# Altium PCB Tigershark 3D R1.6.PcbDoc (part 4 of 4)
Units mil, origin at the board's own origin, x right, y up, seen from the top; angles counter-clockwise.
Board outline 5500 x 4600 mil, 4 copper layers (Top Layer, Groun Plane, Power Plane, Bottom Layer); 326 components, 251 nets, 1041 pads, 903 vias.
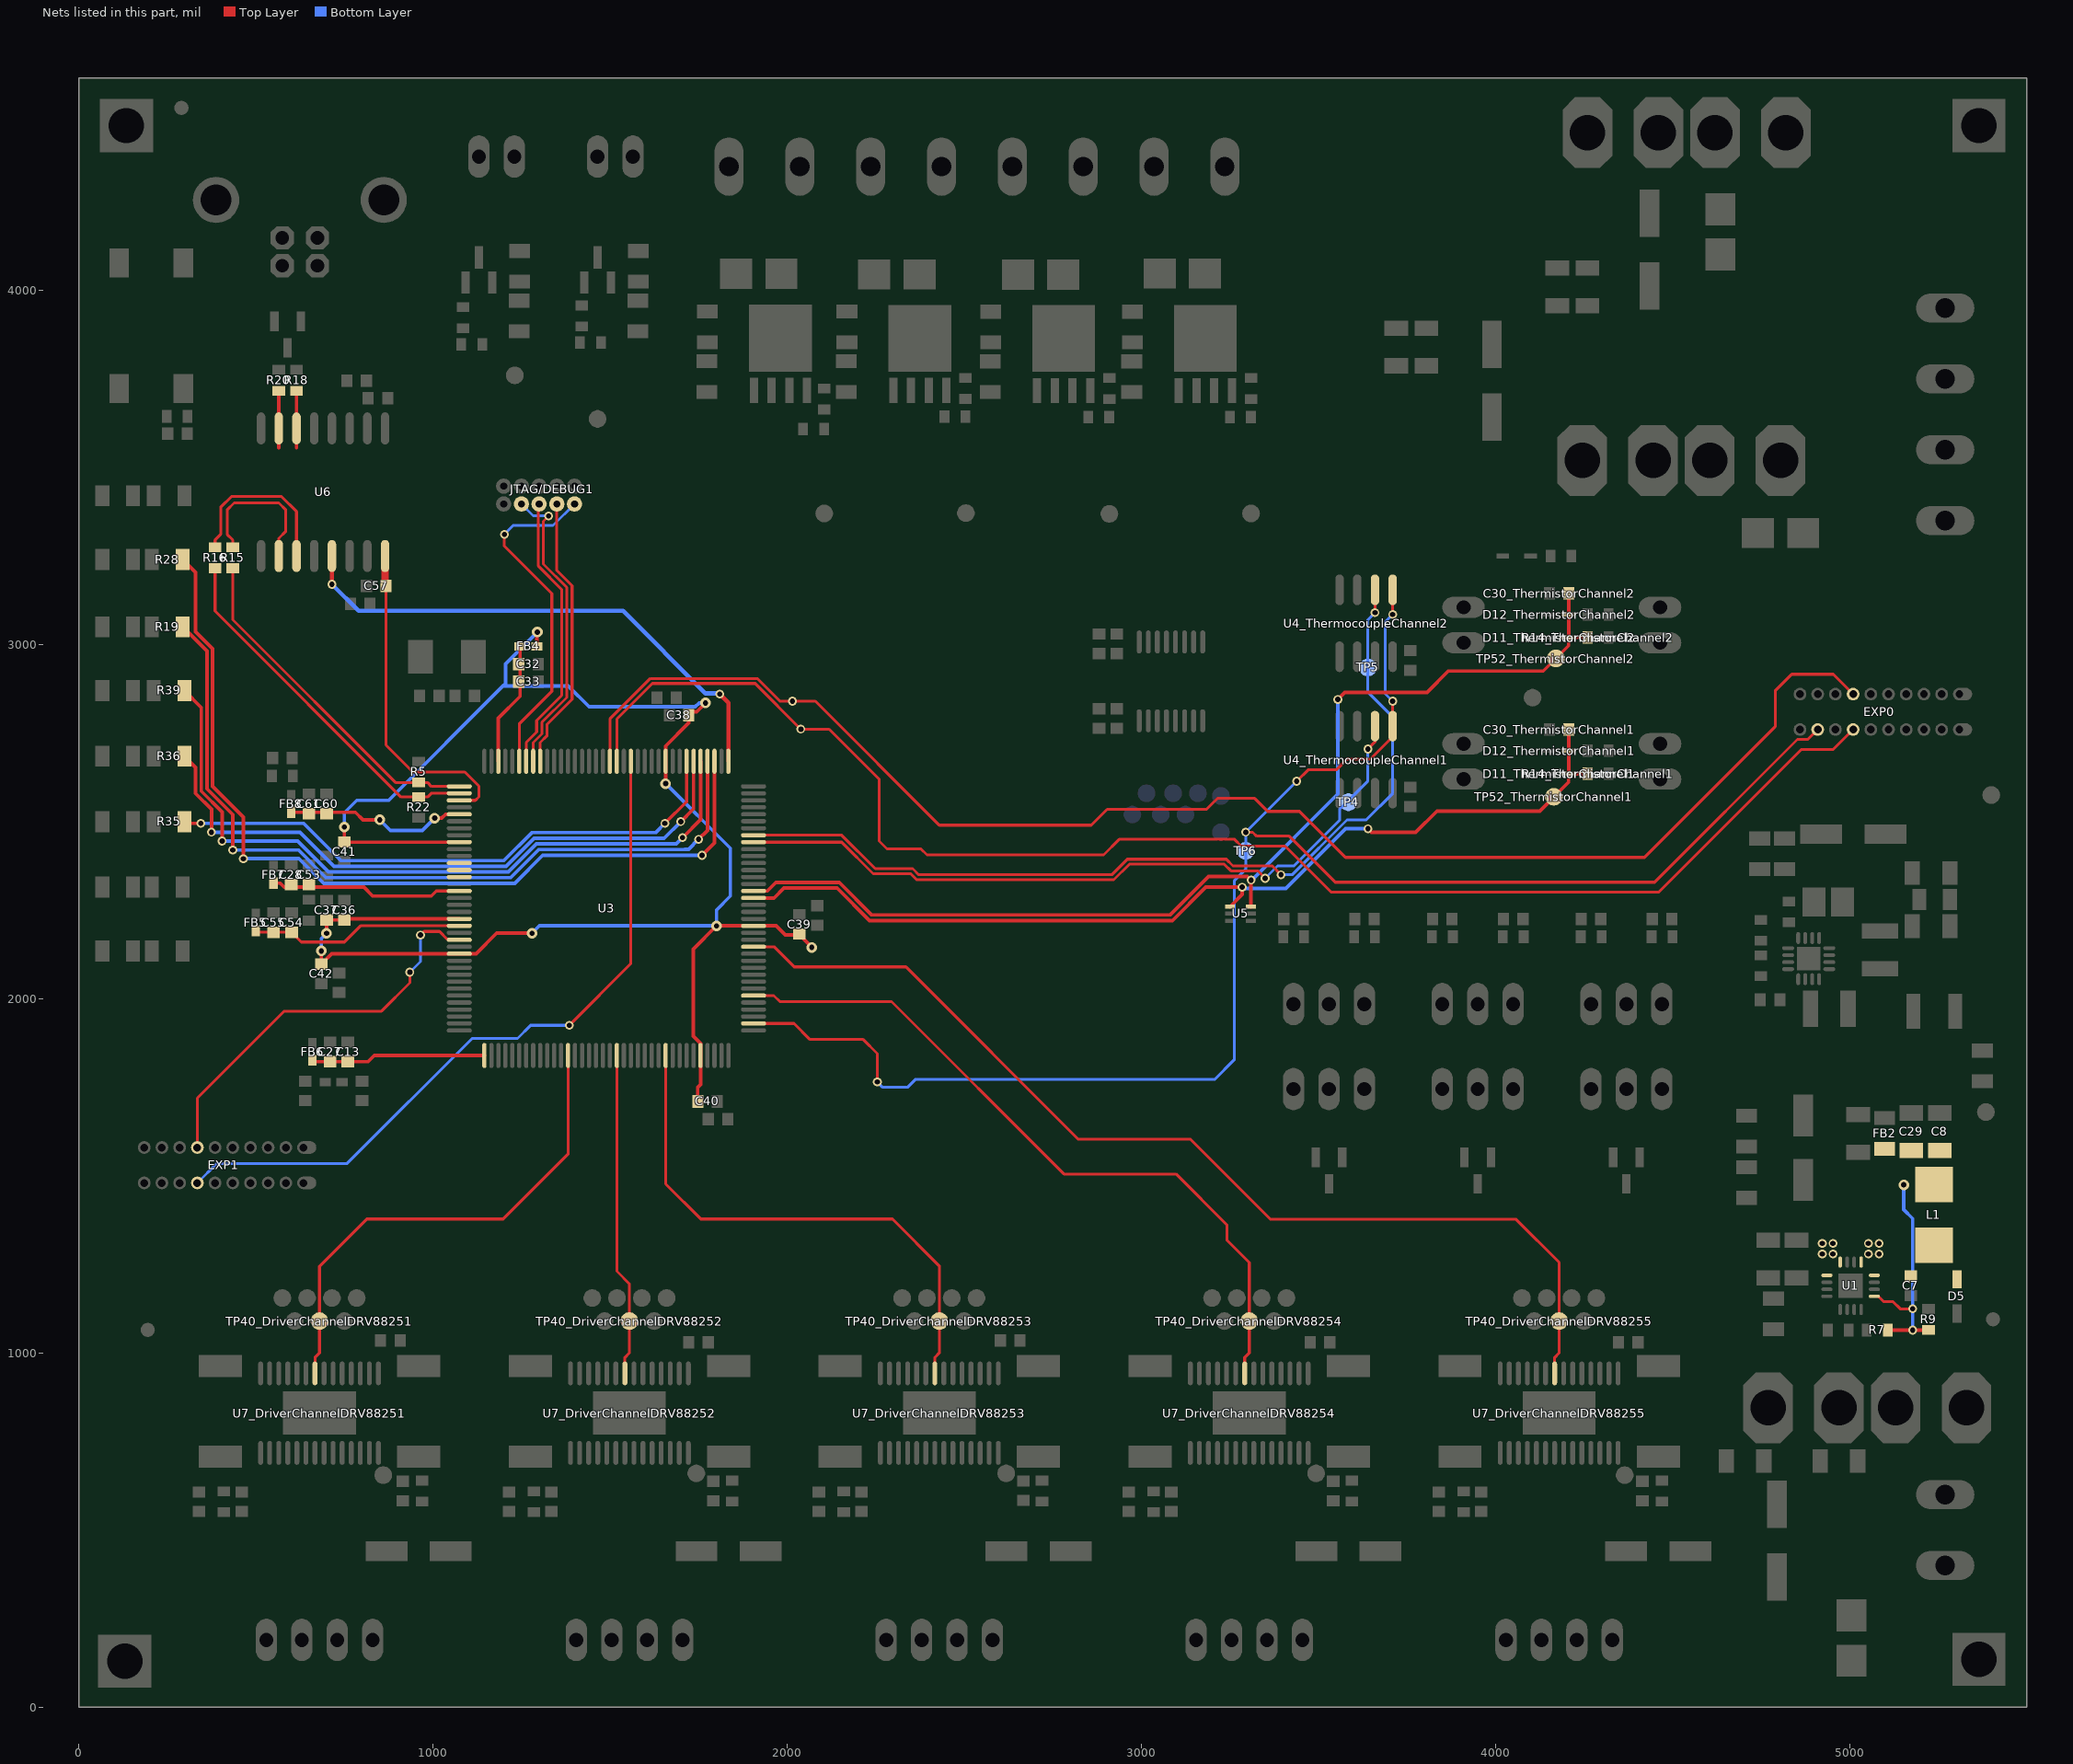
[diagram p6: the nets of this part, all layers, seen from the top]

## Via types
v1: diameter 25, hole 15, Top Layer to Bottom Layer, tented both sides, 432 vias
v2: diameter 30, hole 15, Top Layer to Bottom Layer, tented both sides, 366 vias
v3: diameter 19.68, hole 7.87, Top Layer to Bottom Layer, tented both sides, 75 vias
v4: diameter 50, hole 28, Top Layer to Bottom Layer, tented both sides, 13 vias
v5: diameter 50, hole 20, Top Layer to Bottom Layer, tented both sides, 9 vias
v6: diameter 25, hole 15, Top Layer to Bottom Layer, tented bottom, 8 vias

## Nets (pads, with @x,y where several pads share a name; then routed paths per layer and width w, separated by ;. In a path a pad name is that pad's centre, name@x,y a point inside that pad or via, vN(x,y) a via of type N, cw(c..) or ccw(c..) an arc to the next point about the centre after c; other vN are vias at no path point) (continued)
RX_LED: R19.2 U3.4 | length 2311.6
  Top Layer w10: R19.2@293.31,3050 362,2981.31 362,2592.75 435,2519.75 v1(435,2420) ; v1(1750,2450) 1775.43,2475.43 U3.4@1775.43,2670.35
  Bottom Layer w10: v1(435,2420) 620.25,2420 698.25,2342 1219.88,2342 1298.88,2421 1710.75,2421 1711.75,2422 1722,2422 v1(1750,2450)
RXD1: EXP0.17 U3.18 | length 4245.2
  Top Layer w8: U3.18@1499.84,2670.35 1499.84,2789.84 1614,2904 1916,2904 1980,2840 v1(2015,2840) 2079.8,2840 2429.8,2490 2858.99,2490 2903.99,2535 3184.2,2535 3214.7,2565.5 3320.52,2565.5 3357.02,2529 3446.8,2529 3576.8,2399 4420.81,2399 4790,2768.19 4790,2869.2 4836.8,2916 4954,2916 EXP0.17@5010,2860
SCLK: EXP0.2 TP6.1 U3.110 U4_ThermocoupleChannel1.5 U4_ThermocoupleChannel2.5 | length 4977.4
  Top Layer w8: U3.110@1905.35,1930.2 2019.8,1930.2 2065,1885 2215,1885 2255,1845 v1(2255,1765) ; v1(3295,2470) 3315,2470 3326,2459 3417.81,2459 3547.81,2329 4449.8,2329 4852.8,2732 4882,2732 EXP0.2@4910,2760 ; v1(3439,2614) 3471,2646 3550.8,2646 3580.8,2676 3646,2676 3710,2740 U4_ThermocoupleChannel1.5@3710,2769.49 v1(3710,2840) ; v1(3710,3085) U4_ThermocoupleChannel2.5@3710,3154.49
  Bottom Layer w8: v1(2255,1765) 2270,1750 2340,1750 2362,1772 3207,1772 3262.5,1827.5 3262.5,2332.5 3295,2365 v1(3295,2470) v1(3439,2614) ; v1(3710,2840) 3689,2861 3689,3064 v1(3710,3085)
SHDN: U3.50
SPD: U3.1 U6.13 | length 1503.1
  Top Layer w12: v1(715,3170) U6.13@715,3249.88 ; v1(1810,2860) 1834.49,2835.51 U3.1@1834.49,2670.35
  Bottom Layer w12: v1(715,3170) 790,3095 1537,3095 1770,2862 1808,2862 v1(1810,2860)
STEP1: TP40_DriverChannelDRV88251.1 U3.85 U7_DriverChannelDRV88251.22 | length 1418.9
  Top Layer w8: U7_DriverChannelDRV88251.22@667.2,942.2 667.2,987.2 680,1000 TP40_DriverChannelDRV88251.1@680,1090 680,1244.4 813.6,1378 1198.6,1378 1381.73,1561.13 U3.85@1381.73,1839.65
STEP2: TP40_DriverChannelDRV88252.1 U3.92 U7_DriverChannelDRV88252.22 | length 917.4
  Top Layer w8: U3.92@1519.53,1839.65 1519.53,1230.47 1555,1195 TP40_DriverChannelDRV88252.1@1555,1090 1555,1000 1542.2,987.2 U7_DriverChannelDRV88252.22@1542.2,942.2
STEP3: TP40_DriverChannelDRV88253.1 U3.99 U7_DriverChannelDRV88253.22 | length 1539.8
  Top Layer w8: U3.99@1657.32,1839.65 1657.32,1477.07 1756.4,1378 2297.6,1378 2430,1245.6 TP40_DriverChannelDRV88253.1@2430,1090 2430,1000 2417.2,987.2 U7_DriverChannelDRV88253.22@2417.2,942.2
STEP4: TP40_DriverChannelDRV88254.1 U3.114 U7_DriverChannelDRV88254.22 | length 2055.5
  Top Layer w8: U3.114@1905.35,2008.94 1962.87,2008.94 1979.93,1991.88 2295.13,1991.88 2782.01,1505 3098.4,1505 3242,1361.4 3242,1318.4 3305,1255.4 TP40_DriverChannelDRV88254.1@3305,1090 3305,1000 3292.2,987.2 U7_DriverChannelDRV88254.22@3292.2,942.2
STEP5: TP40_DriverChannelDRV88255.1 U3.121 U7_DriverChannelDRV88255.22 | length 2962.5
  Top Layer w8: U3.121@1905.35,2146.73 1963.67,2146.73 2020.52,2089.88 2335.72,2089.88 2822.6,1603 3139.4,1603 3365.4,1377 4058.6,1377 4180,1255.6 TP40_DriverChannelDRV88255.1@4180,1090 4180,1000 4167.2,987.2 U7_DriverChannelDRV88255.22@4167.2,942.2
STEP_EXP1: EXP1.4 U3.15 | length 2051.7
  Top Layer w8: v1(1385,1925) 1558.9,2098.9 U3.15@1558.9,2670.35
  Bottom Layer w8: EXP1.4@335,1480 390,1535 758.01,1535 1111.01,1888 1239.01,1888 1276.01,1925 v1(1385,1925)
STEP_EXP2: EXP1.17 U3.59 | length 1145.2
  Top Layer w8: EXP1.17@335,1580 335,1719.4 580.6,1965 855,1965 935,2045 v1(935,2075) ; v1(965,2180) 975,2190 1018.73,2190 1040.12,2168.6 1072.46,2168.6 U3.59@1074.65,2166.42
  Bottom Layer w8: v1(935,2075) 965,2105 v1(965,2180)
SW: C7.1 D5.2 L1.1 U1.1 U1.12 U1.13 U1.16
  other v1: 4923.07,1279.53 4953.07,1279.53 5053.07,1279.53 5083.07,1279.53 4923.07,1309.53 4953.07,1309.53 5053.07,1309.53 5083.07,1309.53
SW_OUT: C8.2 C29.1 FB2.1 L1.2 R7.2 R9.1 U1.9 | length 668.1
  Top Layer w8: U1.9@5070,1160 5081.39,1160 5096.86,1144.53 5123.07,1144.53 5143.07,1124.53 v1(5178.07,1124.53)
  Top Layer w10: R7.2@5102.6,1064.53 v1(5178.07,1064.53) R9.1@5227.6,1064.53
  Bottom Layer w10: v2(5153.07,1474.53) 5153.07,1404.53 5178.07,1379.53 v1(5178.07,1064.53)
TC_CS1: TP4.1 U3.136 U4_ThermocoupleChannel1.6 | length 2108.3
  Top Layer w8: U3.136@1905.35,2442.01 2154.43,2442.01 2243.43,2353 2349.01,2353 2366.01,2336 2922.78,2336 2966.71,2379.93 3234.46,2379.93 3253.39,2361 3329,2361 v1(3350,2340) ; v1(3640,2705) 3660,2725 U4_ThermocoupleChannel1.6@3660,2769.49
  Bottom Layer w8: v1(3350,2340) 3385,2375 3431.21,2375 3560,2503.79 3560,2535 3640,2615 v1(3640,2705)
TC_CS2: TP5.1 U3.137 U4_ThermocoupleChannel2.6 | length 2594.3
  Top Layer w8: U3.137@1905.35,2461.69 2154.54,2461.69 2249.23,2367 2354.81,2367 2371.81,2350 2916.98,2350 2960.91,2393.93 3240.26,2393.93 3259.19,2375 3370,2375 v1(3395,2350) ; v1(3660,3090) U4_ThermocoupleChannel2.6@3660,3154.49
  Bottom Layer w8: v1(3395,2350) 3426.01,2350 3581.01,2505 3635,2505 3710,2580 3710,2795 3640,2865 3640,3070 v1(3660,3090)
TCK/SWDCLK: JTAG/DEBUG1.4 U3.28 | length 781.7
  Top Layer w8: U3.28@1302.99,2670.35 1302.99,2722.99 1322,2742 1322,2774 1393,2845 1393,3166 1350,3209 JTAG/DEBUG1.4@1350,3397
TDI: JTAG/DEBUG1.8 U3.29 | length 857.5
  Top Layer w8: U3.29@1283.31,2670.35 1283.31,2723.11 1308,2747.8 1308,2780.6 1378,2850.6 1378,3161.2 1312,3227.2 1312,3348 v1(1327,3363)
  Bottom Layer w8: JTAG/DEBUG1.8@1250,3397 1283.5,3363.5 1327.5,3363.5 v1(1327,3363)
TDO/SWO: JTAG/DEBUG1.6 U3.30 | length 796.4
  Top Layer w8: U3.30@1263.62,2670.35 1263.62,2723.62 1293,2753 1293,2785.4 1364,2856.4 1364,3155.4 1298,3221.4 1298,3395 JTAG/DEBUG1.6@1300,3397
THERM_AN1: C30_ThermistorChannel1.2 D11_ThermistorChannel1.1 D12_ThermistorChannel1.2 R14_ThermistorChannel1.1 TP52_ThermistorChannel1.1 U3.128 U5.4 | length 2795
  Top Layer w10: U3.128@1905.35,2284.53 1963.31,2284.53 1991.24,2312.45 2141.15,2312.45 2233.1,2220.5 3088.13,2220.5 3182.63,2315 v1(3285,2315) 3285,2294.21 U5.4@3250.47,2259.69 ; v1(3640,2480) 3650,2470 3775,2470 3835,2530 4125,2530 4206.57,2611.57 D11_ThermistorChannel1.1@4206.57,2635 R14_ThermistorChannel1.1@4260.47,2635 ; D11_ThermistorChannel1.1@4207.56,2635.98 C30_ThermistorChannel1.2@4207.56,2760
  Bottom Layer w10: v1(3285,2315) 3288.5,2311.5 3408.73,2311.5 3577.23,2480 v1(3640,2480)
THERM_AN2: C30_ThermistorChannel2.2 D11_ThermistorChannel2.1 D12_ThermistorChannel2.2 R14_ThermistorChannel2.1 TP52_ThermistorChannel2.1 U3.129 U5.3 | length 3105.6
  Top Layer w10: U3.129@1905.35,2304.21 1944.21,2304.21 1968.45,2328.45 2147.78,2328.45 2239.73,2236.5 3081.5,2236.5 3190,2345 3300,2345 v1(3310,2335) 3310,2260.16 U5.3@3309.53,2259.69 ; v1(3555,2845) 3575,2865 3807.28,2865 3867.28,2925 4135,2925 4206.57,2996.57 D11_ThermistorChannel2.1@4206.57,3020 R14_ThermistorChannel2.1@4260.47,3020 ; D11_ThermistorChannel2.1@4207.56,3020.98 C30_ThermistorChannel2.2@4207.56,3145
  Bottom Layer w10: v1(3310,2335) 3311.77,2335 3555,2578.23 v1(3555,2845)
TMS/SWDIO: JTAG/DEBUG1.2 U3.31 | length 967.7
  Top Layer w8: v1(1202,3311) 1202,3277.8 1336,3143.8 1336,2868 1243.94,2775.94 U3.31@1243.94,2670.35
  Bottom Layer w8: v1@1202,3311.46 1226.54,3336 1339,3336 JTAG/DEBUG1.2@1400,3397
TX_LED: R28.2 U3.3 | length 2553.2
  Top Layer w10: R28.2@293.31,3240 330,3203.31 330,3035.93 378,2987.93 378,2599.37 465,2512.37 v1(465,2395) ; v1(1760,2405) 1795.12,2440.12 U3.3@1795.12,2670.35
  Bottom Layer w10: v1(465,2395) 466,2396 621.63,2396 691.63,2326 1231,2326 1310,2405 v1(1760,2405)
TXD1: EXP0.4 U3.17 | length 4224.4
  Top Layer w8: U3.17@1519.53,2670.35 1519.53,2789.73 1619.8,2890 1910,2890 v1(2039,2761) 2119,2761 2260,2620 2260,2445 2282,2423 2378.01,2423 2395.01,2406 2893.79,2406 2937.71,2449.93 3263.45,2449.93 3282.38,2431 3406.21,2431 3536.21,2301 4461.4,2301 4864.4,2704 4954,2704 EXP0.4@5010,2760
UD_N: R18.1 U6.6 | length 161.4
  Top Layer w10: 615,3555 R18.1@615,3716.35
UD_P: R20.1 U6.7 | length 161.4
  Top Layer w10: 565,3555 R20.1@565,3716.35
UI_N: R16.2 U6.11 | length 489.4
  Top Layer w8: R16.2@385,3274.53 385,3295 401,3311 401,3387.46 431.54,3418 572.46,3418 615,3375.46 U6.11@615,3249.88
UI_P: R15.2 U6.10 | length 433.1
  Top Layer w8: R15.2@435,3274.53 435,3295 419,3311 419,3380 439,3400 565,3400 585,3380 585,3320 565,3300 U6.10@565,3249.88
UMCU_N: R16.1 R22.1 U3.38 | length 1032.3
  Top Layer w8: R16.1@385,3215.47 385,3094.54 910.02,2569.53 R22.1@960,2569.53 985,2569.53 995.28,2579.8 U3.38@1074.65,2579.8
UMCU_P: R5.1 R15.1 U3.37 | length 980
  Top Layer w8: R15.1@435,3215.47 435,3070 894.53,2610.47 R5.1@960,2610.47 985,2610.47 995.98,2599.49 U3.37@1074.65,2599.49
VBUS: C57.2 U3.39 U6.16 | length 1011.1
  Top Layer w8: U6.16@867.56,3245 867.56,2716.33 943.89,2640 1060,2640 1090,2640 1130,2600 1130,2570 1120.12,2560.12 U3.39@1074.65,2560.12
  Top Layer w20: C57.2@865,3167.56 U6.16@865,3249.88
VDDANA: C13.2 C27.2 FB6.2 U3.73 | length 494.3
  Top Layer w10: FB6.2@663.94,1822.44 C27.2@710,1822.44 C13.2@760,1822.44 817.44,1822.44 834.65,1839.65 U3.73@1145.51,1839.65
  Top Layer w15: FB6.2@660,1826.38 FB6.2@663.94,1822.44
VDDBU: C28.2 C53.2 FB7.2 U3.52 | length 545.6
  Top Layer w10: FB7.2@550,2326.38 568.62,2326.38 580,2315 805,2315 830,2290 995.72,2290 1009.93,2304.21 U3.52@1074.65,2304.21
VDDIN: C54.2 C55.2 FB5.2 U3.57 | length 617.1
  Top Layer w8: FB5.2@501.22,2201.38 FB5.2@505.16,2197.44 ; FB5.2@503.94,2187.44 C55.2@550,2187.44 C54.2@601.22,2187.44 628.66,2160 750,2160 795.79,2205.79 U3.57@1074.65,2205.79 ; C54.2@601.22,2197.44 C54.2@608.66,2190
VDDOUT: C36.2 C37.2 C38.2 C39.2 C40.2 C41.2 C42.2 FB4.1 U3.10 U3.45 U3.56 U3.61 U3.104 U3.124 | length 5110.8
  Top Layer w10: v2(685,2135) C42.2@685,2097.56 714.49,2127.05 U3.61@1074.65,2127.05 1122.05,2127.05 1180,2185 v2(1280,2185) ; v2(700,2185) C37.2@700,2222.44 C36.2@750,2222.44 753.03,2225.47 U3.56@1074.65,2225.47 ; v2(750,2485) C41.2@750,2442.56 750.55,2442.01 U3.45@1074.65,2442.01 ; FB4.1@1293.62,2995 1293.62,3033.62 v2(1295,3035) ; v2(1657.32,2607.32) U3.10@1657.32,2670.35 1657.32,2713.54 1722.56,2778.77 C38.2@1722.56,2800 1732.56,2810 1745,2810 v2(1770,2835) ; C40.2@1747.87,1710 1747.87,1749.8 1755.75,1757.68 U3.104@1755.75,1839.65 1755.75,1873.4 1735,1894.14 1735,2140 v2(1800.79,2205.79) U3.124@1905.35,2205.79 1969.21,2205.79 ; 1970.16,2204.84 1995,2180 C39.2@2035,2180 ; C39.2@2035,2182.44 C39.2@2035,2180 ; v2(2070,2145) C39.2@2035,2180
  Bottom Layer w10: v2(685,2135) 685,2170 v2(700,2185) ; v2(750,2485) 750,2525 785,2560 875,2560 1197.5,2882.5 ; v2(1280,2185) 1300.79,2205.79 v2(1800.79,2205.79) 1800.79,2250.79 1840,2290 1840,2425 v2@1657.5,2607.5 ; v2(1295,3035) 1205,2945 1205,2890 1197.5,2882.5 ; v2(1770,2835) 1751.77,2835 1740.77,2824 1441,2824 1382.5,2882.5 1197.5,2882.5
VDDPLL: C32.2 C33.2 FB4.2 U3.34 | length 350.1
  Top Layer w10: U3.34@1184.88,2670.35 1184.88,2792.12 1246.38,2853.62 FB4.2@1246.38,2995
VDDUTMI: C60.2 C61.2 FB8.2 U3.41 | length 524.9
  Top Layer w10: FB8.2@600,2526.38 781.25,2526.38 802.63,2505 v2(850,2505) ; v2(1005,2510) 1025,2510 1035.75,2520.75 U3.41@1074.65,2520.75
  Bottom Layer w10: v2@850,2515 v2(850,2505) 880,2475 970,2475 v2(1005,2510)
X_LED: R39.2 U3.5 | length 2081.8
  Top Layer w10: R39.2@298.31,2870 346,2822.31 346,2586.12 405,2527.12 v1(405,2445) ; v1(1705,2455) 1755.75,2505.75 U3.5@1755.75,2670.35
  Bottom Layer w10: v1(405,2445) 617.88,2445 704.88,2358 1213.25,2358 1292.25,2437 1687,2437 v1(1705,2455)
XIN32: U3.48
XOUT32: U3.49
Y_LED: R36.2 U3.6 | length 1849
  Top Layer w10: R36.2@298.31,2685 330,2653.31 330,2579.49 375,2534.49 v1(375,2470) ; v1(1700,2500) 1736.06,2536.06 U3.6@1736.06,2670.35
  Bottom Layer w10: v1(375,2470) 625,2470 721,2374 1206.63,2374 1285.63,2453 1653,2453 v1(1700,2500)
Z_LED: R35.2 U3.7 | length 1646.5
  Top Layer w10: R35.2@298.31,2500 303.31,2495 v1(345,2495) ; v1(1655,2495) 1716.38,2556.38 U3.7@1716.38,2670.35
  Bottom Layer w10: v1(345,2495) 635,2495 740,2390 1200,2390 1279,2469 1629,2469 v1(1655,2495)
pads on no net: D12.2 FD1.1 FD2.1 FD3.1 JTAG/DEBUG1.1@1475.59,3478.5 JTAG/DEBUG1.7 U1.6 U1.7 U3.55 U3.111 U3.130 U3.138 U4_ThermocoupleChannel1.8 U4_ThermocoupleChannel2.8 U7_DriverChannelDRV88251.18 U7_DriverChannelDRV88251.19 U7_DriverChannelDRV88251.23 U7_DriverChannelDRV88251.27 U7_DriverChannelDRV88252.18 U7_DriverChannelDRV88252.19 U7_DriverChannelDRV88252.23 U7_DriverChannelDRV88252.27 U7_DriverChannelDRV88253.18 U7_DriverChannelDRV88253.19 U7_DriverChannelDRV88253.23 U7_DriverChannelDRV88253.27 U7_DriverChannelDRV88254.18 U7_DriverChannelDRV88254.19 U7_DriverChannelDRV88254.23 U7_DriverChannelDRV88254.27 U7_DriverChannelDRV88255.18 U7_DriverChannelDRV88255.19 U7_DriverChannelDRV88255.23 U7_DriverChannelDRV88255.27 USB.P$1 USB.P$2

## Polygon pours and split planes (outlines as drawn)
+12VCC2 on Top Layer "Top Layer-No Net" (solid, pour order 116): 4790,3395 4520,3395 4520,3645 4120,3645 4120,3765 3922,3765 3922,3810 3650,3810 3650,3650 3385,3650 3385,3300 4195,3300 4195,3185 4790,3185
NetC10_2 on Top Layer "Mechanical 15-No Net" (solid, remove dead copper, pour order 86): 5048.07,1209.53 5048.07,1189.53 5083.07,1189.53 5083.07,1179.53 5148.07,1179.53 5148.07,1219.53 5083.07,1219.53 5083.07,1209.53
SW on Top Layer "Mechanical 15-No Net" (solid, pour order 88): 5051,1217 5051,1244 5027,1244 5027,1330 5180,1330 5180,1360 5290,1360 5290,1240 5325,1240 5325,1175 5280,1175 5280,1200 5160,1200 5160,1225 5086,1225 5086,1217
+12VCC3 on Top Layer "Top Layer-No Net" (solid, remove dead copper, pour order 75): 4580,4090 4580,4155 4720,4155 4720,4311 4535,4311 4535,4575 3650,4575 3650,3995 4395,3995 4395,4090
GND on Top Layer "Top Layer-No Net" (solid, remove dead copper, pour order 84): 5475,3650 4128,3650 4128,3771 3931,3771 3931,3815 3655,3815 3655,3985 4400,3985 4400,4085 4585,4085 4585,4150 4725,4150 4725,3920 5110,3920 5110,3820 5475,3820
GND on Top Layer "Top Layer-No Net" (solid, remove dead copper, pour order 61): 1480,3925 1480,4060 1490,4060 1495,4060 1495,4130 1540,4130 1540,3925
GND on Top Layer "Top Layer-No Net" (solid, remove dead copper, pour order 61): 1145,3925 1145,4060 1155,4060 1160,4060 1160,4130 1205,4130 1205,3925
NetF3_1 on Top Layer "Top Layer-No Net" (solid, remove dead copper, pour order 73): 5125,500 5475,500 5475,955 5055,955 5055,735 5125,735
NetD18_1 on Top Layer "Top Layer-No Net" (solid, remove dead copper, pour order 72): 3640,4576.22 3640,3770 3385,3770 3385,3735 3340,3735 3340,3765 3080,3765 3080,3686.22 2940,3686.22 2940,3766.22 3015,3766.22 3015,3906.22 3090,3906.22 3090,3981.22 3135,3981.22 3135,4576.22
+12VCC1 on Top Layer "Top Layer-No Net" (solid, remove dead copper, pour order 82): 5045,955 4650,955 4650,750 4680,750 4680,360 4835,360 4835,285 4625,285 4625,25 4940,25 4940,205 5070,205 5070,320 5115,320 5115,655 4995,655 4995,735 5045,735
GND on Top Layer "Top Layer-No Net" (solid, remove dead copper, pour order 115): 5475,2990 5475,3390 5470,3395 5165,3395 4800,3395 4800,3250 4800,2990
NetF1_1 on Top Layer "Top Layer-No Net" (solid, remove dead copper, pour order 113): 5475,3400 5475,3645 4530,3645 4530,3494.66 4530,3422.27 4530,3400
NetF1_1 on Top Layer "Top Layer-No Net" (solid, remove dead copper, pour order 114): 5475,3400 5475,3645 4530,3645 4530,3494.66 4530,3422.27 4530,3400
SW_OUT on Top Layer "Top Layer-No Net" (solid, remove dead copper, pour order 62): 5294.07,1599.53 5294.07,1419.53 5133.07,1419.53 5133.07,1544.53 5069.07,1544.53 5069.07,1599.53
+12VCC2 on Top Layer "Top Layer-No Net" (solid, remove dead copper, pour order 111): 1275,4090 1275,4455 1190,4455 1190,4140 1215,4140 1215,4090
+12VCC2 on Top Layer "Top Layer-No Net" (solid, remove dead copper, pour order 112): 1610,4090 1610,4455 1525,4455 1525,4140 1550,4140 1550,4090
GND on Top Layer "Top Layer-No Net" (solid, remove dead copper, pour order 98): 4731.55,1915.18 4858.55,1915.18 4858.55,1970.18 4772.55,1970.18 4772.55,2077.18 4852.55,2077.18 4852.55,2131.18 4803.55,2131.18 4803.55,2102.18 4731.55,2102.18
GND on Top Layer "Top Layer-No Net" (solid, remove dead copper, pour order 96): 4914.55,2117.18 4914.55,2147.18 5145.55,2147.18 5145.55,1913.18 4969.55,1913.18 4969.55,2029.18 5010.55,2029.18 5010.55,2117.18
NetC24_2 on Top Layer "Top Layer-No Net" (solid, remove dead copper, pour order 97): 4849.55,2068.18 4859.55,2068.18 4859.55,2043.18 4859.55,1978.18 4784.55,1978.18 4784.55,2018.18 4849.55,2018.18
NetL2_1 on Top Layer "Top Layer-No Net" (solid, remove dead copper, pour order 95): 4866.55,2155.18 4922.55,2155.18 4922.55,2313.18 4866.55,2313.18
SW on Top Layer "Mechanical 15-No Net" (solid, pour order 92): 4903.07,1214.53 4968.07,1214.53 4968.07,1229.53 4978.07,1229.53 4978.07,1329.53 4903.07,1329.53
3.3VCC on Top Layer "Top Layer-No Net" (solid, remove dead copper, pour order 67): 5225,2250 5225,2400 5310,2400 5310,2500 5035,2500 5035,2385 4785,2385 4785,2330 5150,2330 5150,2250
+12VCC2 on Top Layer "Top Layer-No Net" (solid, remove dead copper, pour order 60): 1930,4566.64 1745,4566.64 1745,3921.64 1885,3921.64 1885,3996.64 1930,3996.64 1930,4566.64
+12VCC2 on Top Layer "Top Layer-No Net" (solid, remove dead copper, pour order 89): 2324,4566.64 2139,4566.64 2139,3921.64 2279,3921.64 2279,3996.64 2324,3996.64 2324,4566.64
+12VCC2 on Top Layer "Top Layer-No Net" (solid, remove dead copper, pour order 90): 2730,4566.22 2545,4566.22 2545,3921.22 2685,3921.22 2685,3996.22 2730,3996.22 2730,4566.22
+12VCC3 on Top Layer "Top Layer-No Net" (solid, remove dead copper, pour order 91): 3130,4566.22 2945,4566.22 2945,3921.22 3085,3921.22 3085,3996.22 3130,3996.22
NetC4_1 on Top Layer "Top Layer-No Net" (solid, remove dead copper, pour order 99): 4943.55,2319.18 4943.55,2227.18 4973.55,2227.18 4973.55,2166.18 5145.55,2166.18 5255,2165 5255,2245 5310,2245 5310,2315 5225,2315 5225,2240 5145,2240 5145.55,2319.18
NetD10_1 on Top Layer "Top Layer-No Net" (solid, remove dead copper, pour order 109): 1445,4090 1485,4090 1485,4125 1515,4155 1515,4455 1415,4455 1415,4155 1445,4125
NetD11_1 on Top Layer "Top Layer-No Net" (solid, remove dead copper, pour order 110): 1110,4090 1150,4090 1150,4130 1180,4160 1180,4455 1080,4455 1080,4160 1110,4130
GND on Top Layer "Top Layer-No Net" (solid, remove dead copper, pour order 69): 4950,200 4950,25 4955,20 5275,20 5275,225 5475,225 5475,505 5125,505 5125,315 5075,315 5075,200
NetF2_1 on Top Layer "Top Layer-No Net" (solid, remove dead copper, pour order 71): 5115,3825 5475,3825 5475,4575 4545,4575 4545,4320 4730,4320 4730,3925 5115,3925
NetC22_1 on Top Layer "Top Layer-No Net" (solid, remove dead copper, pour order 94): 4869,2070 4924,2070 4924,2090 4960,2090 4960,1905 5154,1905 5154,2020 5204,2020 5204,1840 4869,1840
NetC10_2 on Top Layer "Top Layer-No Net" (solid, remove dead copper, pour order 61): 4750,1230 4750.42,1229.58 4895,1230 4895,1205 4950,1205 4950,1175 4895,1175 4895,1065 4830,1065 4830,1130 4750,1130
GND on Top Layer "Top Layer-No Net" (solid, remove dead copper, pour order 80): 250,25 680,25 680,125 485,125 485,530 315,530 315,635 335,635 335,745 1025,745 1025,670 995,670 995,615 895,615 895,565 935,565 935,600 995,600 995,525 870,525 870,125 680,125 680,25 1115,25 1115,1325 870,1325 870,900 525,900 525,1325 250,1325
GND on Top Layer "Top Layer-No Net" (solid, remove dead copper, pour order 79): 1125,25 1555,25 1555,125 1360,125 1360,530 1190,530 1190,635 1210,635 1210,745 1900,745 1900,670 1870,670 1870,615 1770,615 1770,565 1810,565 1810,600 1870,600 1870,525 1745,525 1745,125 1555,125 1555,25 1990,25 1990,1325 1745,1325 1745,900 1400,900 1400,1325 1125,1325
GND on Top Layer "Top Layer-No Net" (solid, remove dead copper, pour order 78): 2000,25 2430,25 2430,125 2235,125 2235,530 2065,530 2065,635 2085,635 2085,745 2775,745 2775,670 2745,670 2745,615 2645,615 2645,565 2685,565 2685,600 2745,600 2745,525 2620,525 2620,125 2430,125 2430,25 2865,25 2865,1325 2620,1325 2620,900 2275,900 2275,1325 2000,1325
GND on Top Layer "Top Layer-No Net" (solid, remove dead copper, pour order 77): 2875,25 3305,25 3305,125 3110,125 3110,530 2940,530 2940,635 2960,635 2960,745 3650,745 3650,670 3620,670 3620,615 3520,615 3520,565 3560,565 3560,600 3620,600 3620,525 3495,525 3495,125 3305,125 3305,25 3740,25 3740,1325 3495,1325 3495,900 3150,900 3150,1325 2875,1325
GND on Top Layer "Top Layer-No Net" (solid, remove dead copper, pour order 76): 3750,25 4180,25 4180,125 3985,125 3985,530 3815,530 3815,635 3835,635 3835,745 4525,745 4525,670 4495,670 4495,615 4395,615 4395,565 4435,565 4435,600 4495,600 4495,525 4370,525 4370,125 4180,125 4180,25 4615,25 4615,1325 4370,1325 4370,900 4025,900 4025,1325 3750,1325
+5VCC on Top Layer "Top Layer-No Net" (solid, remove dead copper, pour order 64): 4680,1615 4680,1795 5415,1795 5415,1745 4850,1745 4850,1735 5130,1735 5130,1615
NetF4_2 on Top Layer "Top Layer-No Net" (solid, remove dead copper, pour order 87): 5270,2020 5270,1825 5415,1825 5415,2020
+12VCC1 on Top Layer "Top Layer-No Net" (solid, remove dead copper, pour order 65): 4825,1045 4825,1120 4725,1120 4725,1250 4630,1250 4630,1045
GND on Top Layer "Mechanical 15-No Net" (solid, pour order 93): 4990,1235 5020,1235 5020,1380 4740,1380 4740,1275 4895,1275 4895,1335 4990,1335
GND on Top Layer "Top Layer-No Net" (solid, remove dead copper, pour order 103): 1885,3758 1885,3673 1740,3673 1740,3270 2075,3270 2075,3673 2025,3673 2025,3758
GND on Top Layer "Top Layer-No Net" (solid, remove dead copper, pour order 102): 2278.5,3757.61 2278.5,3672.61 2133.5,3672.61 2133.5,3269.61 2468.5,3269.61 2468.5,3672.61 2418.5,3672.61 2418.5,3757.61
GND on Top Layer "Top Layer-No Net" (solid, remove dead copper, pour order 101): 2684.5,3757.19 2684.5,3672.19 2539.5,3672.19 2539.5,3269.19 2874.5,3269.19 2874.5,3672.19 2824.5,3672.19 2824.5,3757.19
GND on Top Layer "Top Layer-No Net" (solid, remove dead copper, pour order 100): 3084.5,3757.19 3084.5,3672.19 2939.5,3672.19 2939.5,3269.19 3274.5,3269.19 3274.5,3672.19 3224.5,3672.19 3224.5,3757.19
NetD16_1 on Top Layer "Top Layer-No Net" (solid, remove dead copper, pour order 74): 2920,4566.22 2920,3780 2875,3780 2875,3766.22 2675,3766.22 2675,3681.22 2540,3681.22 2540,3766.22 2610,3766.22 2610,3906.22 2690,3906.22 2690,3986.22 2735,3986.22 2735,4566.22
NetD14_1 on Top Layer "Top Layer-No Net" (solid, remove dead copper, pour order 81): 2514,4566.64 2514,3780 2469,3780 2469,3766.64 2269,3766.64 2269,3681.64 2134,3681.64 2134,3766.64 2204,3766.64 2204,3906.64 2284,3906.64 2284,3986.64 2329,3986.64 2329,4566.64
NetD12_1 on Top Layer "Top Layer-No Net" (solid, remove dead copper, pour order 85): 2120,4566.64 2120,3750 2084,3750 2084,3767 1875,3767 1875,3681.64 1740,3681.64 1740,3766.64 1810,3766.64 1810,3906.64 1890,3906.64 1890,3986.64 1935,3986.64 1935,4566.64
NetF3_1 on Bottom Layer "Top Layer-No Net" (solid, remove dead copper, pour order 118): 5055,955 5055,755 5125,755 5125,510 5465,510 5465,955
+12VCC1 on Bottom Layer "Top Layer-No Net" (solid, remove dead copper, pour order 117): 4625,960 5045,960 5045,25 4625,25
NetC10_2 on Bottom Layer "Mechanical 15-No Net" (solid, pour order 66): 4833.07,1187.74 4893.07,1187.74 4893.07,1139.53 5083.07,1139.53 5083.07,1214.53 5148.07,1214.53 5148.07,1064.53 4833.07,1064.53
SW on Bottom Layer "Mechanical 15-No Net" (solid, pour order 68): 5103.07,1249.53 4903.07,1249.53 4903.07,1329.53 5103.07,1329.53
GND on Bottom Layer "Top Layer-No Net" (solid, remove dead copper, pour order 108): 250,1325 250,25 1115,25 1115,1325
+12VCC3 on Bottom Layer "Top Layer-No Net" (solid, remove dead copper, pour order 63): 2945,4575 2945,4000 4180,4000 4180,4575
NetF2_1 on Bottom Layer "Top Layer-No Net" (solid, remove dead copper, pour order 70): 5115,3825 5475,3825 5475,4575 4545,4575 4545,4090 4730,4090 4730,3925 5115,3925
GND on Bottom Layer "Top Layer-No Net" (solid, remove dead copper, pour order 83): 5475,3650 4125,3650 4125,3920 5110,3920 5110,3820 5475,3820
GND on Bottom Layer "Top Layer-No Net" (solid, remove dead copper, pour order 107): 1125,1325 1125,25 1990,25 1990,1325
GND on Bottom Layer "Top Layer-No Net" (solid, remove dead copper, pour order 106): 2000,1325 2000,25 2865,25 2865,1325
GND on Bottom Layer "Top Layer-No Net" (solid, remove dead copper, pour order 105): 2875,1325 2875,25 3740,25 3740,1325
GND on Bottom Layer "Top Layer-No Net" (solid, remove dead copper, pour order 104): 3750,1325 3750,25 4615,25 4615,1325
INPUT_GND on Groun Plane (split plane): 934.9,4222.11 881.4,4168.6 880.29,4166.95 879.9,4165 879.9,3901.25 879.9,3821.25 880.29,3819.3 881.4,3817.65 914.9,3784.14 914.9,3562.11 827.89,3475.1 547.11,3475.1 465.1,3557.11 465.1,3852.5 465.1,3932.5 465.1,4065 464.71,4066.95 463.6,4068.6 305.1,4227.11 305.1,4579.9 934.9,4579.9
GND on Groun Plane (split plane): 5479.9,20.1 20.1,20.1 20.1,4579.9 294.9,4579.9 294.9,4225 295.29,4223.05 296.4,4221.4 454.9,4062.89 454.9,3932.5 454.9,3852.5 454.9,3555 455.29,3553.05 456.4,3551.4 541.4,3466.4 543.05,3465.29 545,3464.9 830,3464.9 831.95,3465.29 833.6,3466.4 923.6,3556.4 924.71,3558.05 925.1,3560 925.1,3786.25 924.71,3788.2 923.6,3789.85 890.1,3823.36 890.1,3901.25 890.1,4162.89 943.6,4216.4 944.71,4218.05 945.1,4220 945.1,4579.9 5479.9,4579.9
NetF2_1 on Power Plane (split plane): 5479.9,3650.1 4530.1,3650.1 4530.1,4579.9 5479.9,4579.9
NetF1_1 on Power Plane (split plane): 5479.9,3395.1 4530.1,3395.1 4530.1,3639.9 5479.9,3639.9
+12VCC3 on Power Plane (split plane): 4519.9,3900.1 2935.1,3900.1 2935.1,4579.9 4519.9,4579.9
NetD25_1 on Power Plane (split plane): 5479.9,500.1 5057.1,500.1 5057.1,1014.9 5479.9,1014.9
+5VCC on Power Plane (split plane): 5479.9,1025.1 5055.94,1025.1 5055.6,1025.6 5053.95,1026.71 5052,1027.1 5050.05,1026.71 5048.4,1025.6 5048.06,1025.1 4790.1,1025.1 4790.1,1265 4789.71,1266.95 4788.6,1268.6 4786.95,1269.71 4785,1270.1 4625.1,1270.1 4625.1,1849.9 5479.9,1849.9
3.3VCC on Power Plane (split plane): 964.9,4202 964.9,3772 964.9,3513.25 965.29,3511.3 966.4,3509.65 968.05,3508.54 970,3508.15 1478.64,3508.15 1602.4,3384.4 1602.4,3384.39 1660.4,3326.4 1662.05,3325.29 1664,3324.9 4525,3324.9 4526.95,3325.29 4528.6,3326.4 4529.71,3328.05 4530.1,3330 4530.1,3384.9 5479.9,3384.9 5479.9,1860.1 4620,1860.1 4618.05,1859.71 4616.4,1858.6 4615.29,1856.95 4614.9,1855 4614.9,1270.1 4445,1270.1 4444.99,1270.1 4444.02,1269.9 4443.05,1269.71 4443.04,1269.71 4443.04,1269.7 4442.23,1269.16 4441.4,1268.6 4441.39,1268.6 4440.84,1267.77 4440.29,1266.95 4440.29,1266.94 4440.28,1266.94 4440.09,1265.96 4439.9,1265 4439.9,1264.99 4440.89,900.1 20.1,900.1 20.1,4579.9 964.9,4579.9
+12VCC2 on Power Plane (split plane): 2924.9,3895 2925.29,3893.05 2926.4,3891.4 2928.05,3890.29 2930,3889.9 4519.9,3889.9 4519.9,3645 4519.9,3390 4519.9,3335.1 1666.11,3335.1 1609.61,3391.6 1609.6,3391.6 1484.35,3516.85 1482.7,3517.96 1480.75,3518.35 975.1,3518.35 975.1,3772 975.1,4202 975.1,4579.9 2924.9,4579.9
+12VCC1 on Power Plane (split plane): 4779.9,1020 4780.29,1018.05 4781.4,1016.4 4783.05,1015.29 4785,1014.9 5046.9,1014.9 5046.9,495 5047.29,493.05 5048.4,491.4 5050.05,490.29 5052,489.9 5479.9,489.9 5479.9,20.1 20.1,20.1 20.1,889.9 561.9,889.9 561.9,761 562.29,759.05 563.4,757.4 564.4,756.4 566.05,755.29 568,754.9 792,754.9 793.95,755.29 795.6,756.4 796.71,758.05 797.1,760 797.1,889.9 4446,889.9 4446.01,889.9 4447,890.1 4447.95,890.29 4447.96,890.29 4447.96,890.3 4448.8,890.86 4449.6,891.4 4449.61,891.4 4450.17,892.24 4450.71,893.05 4450.71,893.06 4450.72,893.06 4450.91,894.05 4451.1,895 4451.1,895.01 4450.11,1259.9 4779.9,1259.9
no net on Power Plane (split plane): 786.9,765.1 572.1,765.1 572.1,889.9 786.9,889.9

## Keep-outs
Keep-Out Layer:
  lines w10: 25,25 5475,25 5475,4575 25,4575 25,25

## Other copper
Groun Plane (plane layer: these items are gaps in the copper):
  lines w10: 300,4600 300,4225 460,4065 460,3932.5 460,3852.5 460,3555 545,3470 830,3470 920,3560 920,3786.25 885,3821.25 885,3901.25 885,4165 940,4220 940,4600
Power Plane (plane layer: these items are gaps in the copper):
  lines w10: 0,0 1,895 4446,895 4445,1265 4785,1265 4785,1020 5510,1020 ; 567,895 567,761 568,760 792,760 792,895 ; 970,4600 970,4202 970,3772 970,3513.25 1480.75,3513.25 1606,3388 1664,3330 3200,3330 3655,3330 4525,3330 4525,3390 ; 2930,4600 2930,3895 3665,3895 ; 3645,3895 4525,3895 ; 4525,4610 4525,3645 ; 4620,1265 4620,1855 5360,1855 5500,1855 ; 5052,1022 5052,495 5503,495 ; 5510,3390 5140,3390 4525,3390 ; 5510,3645 4525,3645 ; 4525,3390 4525,3645

## Silkscreen, mask and mechanical layers (free items; w line width, h text height)
Top Overlay:
  lines w10: 40,40 40,220 220,220 220,40 195,40 40,40 ; 45,4375 200,4375 225,4375 225,4555 45,4555 45,4375 ; 5275,45 5455,45 5455,225 5275,225 5275,45 ; 5275,4375 5275,4555 5455,4555 5455,4375 5275,4375
  text "HEATBED" at 4730,4265 h120
  text "FAN-0" at 1025,4173.64 h120
  text "FAN-1" at 1360,4173.64 h120
  text "HEAT-0" at 1775,4125 h100
  text "HEAT-1" at 2160,4124 h100
  text "HEATBED" at 2971,4124.22 h100
  text "HEAT-2" at 2574,4123 h100
  text "HEATERS" at 3466,4065 h130 r90
  text "PWR IN 3" at 5036,3653 h100 r90
  text "12V - 24V" at 5106,3648 h100 r90
  text "PWR" at 50,3505 h100
  text "MOSFETS" at 4125,3335 h120
  text "TX" at 45,3320 h100
  text "PWR IN 2" at 5026,3253 h100 r90
  text "12V - 24V" at 5106,3253 h100 r90
  text "Thermocouples" at 3460,3225 h90
  text "Thermistors" at 4270,3220 h90
  text "USB Isolation" at 985,3195 h100 r90
  text "RX" at 45,3135 h100
  text "Smart Port" at 4707,2975 h155
  text "X AXIS" at 45,2950 h100
  text "Y AXIS" at 45,2770 h100
  text "Z AXIS" at 45,2580 h100
  text "EXT-0" at 45,2395 h100
  text "Tigershark 3D" at 2005,2350 h220
  text "Prototype ZERO" at 2300,2285 h80
  text "X" at 3455,2255 h300
  text "Y" at 3870,2255 h300
  text "Z" at 4320,2255 h300
  text "EXT-1" at 45,2215 h100
  text "Designed By Adam Vadala-Roth" at 2140,2210 h90
  text "3.3V 2A" at 5450,2080 h150 r90
  text "AVR" at 100,2060 h150 r270
  text "S" at 2450,1860 h2400
  text "S" at 2090,1835 h210
  text "G" at 2920,1830 h330
  text "GPIO Port" at 37,1690 h155
  text "MAX / MIN" at 4660,1690 h120 r90
  text "ENDSTOPS" at 3310,1600 h120 r90
  text "5V 3A" at 5450,1265 h150 r90
  text "PWR IN 2" at 5035,329.5 h90 r90
  text "12V - 24V" at 5100,329.5 h90 r90
  text "STEPPER DRIVERS" at 125,250 h130 r90
  text "2.5A Per Phase" at 215,250 h130 r90
  text "X" at 270,45 h300
  text "Y" at 1145,45 h300
  text "Z" at 2020,45 h300
  text "E" at 2890,45 h300
  text "0" at 3585,45 h300
  text "E" at 3780,45 h300
  text "1" at 4460,45 h300
Bottom Overlay:
  text "Tigershark 3D" at 4525,1515 h250
  text "Powered by TinyG" at 4520,1375 h140
  text "Based On the Work of Ultimachine," at 4500,1275 h140
  text "Arduino, RepRap, and Synthetos.com" at 4500,1160 h140
  text "Developed by Adam Vadala-Roth in" at 4500,1045 h140
  text "collaboration with Johnny Russel" at 4500,925 h140
  text "and Alden Hart" at 4500,810 h140
  text "G" at 3795,510 h310
  text "S" at 4195,510 h2000
  text "S" at 4515,490 h175
  text "#YOLO" at 4495,265 h200
Mechanical 15:
  lines w10: 0,0 0,4600 5500,4600 5500,760 5500,400 5500,0 0,0

## Text inside footprints (layer, text, board x,y; h text height)
FAN-1: Mechanical 16 "1" at 1627.5,4440.08 h62 r180
FAN-2: Mechanical 16 "1" at 1292.5,4440.08 h62 r180
FETS: Top Overlay "4" at 2336,4264.22 h77.5; Top Overlay "3" at 2136,4264.22 h77.5; Top Overlay "2" at 1936,4264.22 h77.5; Top Overlay "1" at 1751,4264.22 h77.5; Top Overlay "5" at 2536,4264.22 h77.5; Top Overlay "6" at 2736,4264.22 h77.5; Top Overlay "7" at 2936,4264.22 h77.5; Top Overlay "8" at 3136,4264.22 h77.5
"Heat Power": Top Overlay "4" at 5185,3450 h77.5 r270; Top Overlay "3" at 5185,3650 h77.5 r270; Top Overlay "2" at 5185,3850 h77.5 r270; Top Overlay "1" at 5185,4035 h77.5 r270
MAX1_EndstopChannel1: Mechanical 16 "1" at 3367.5,1682.5 h62
MAX1_EndstopChannel2: Mechanical 16 "1" at 4207.5,1682.5 h62
MAX1_EndstopChannel3: Mechanical 16 "1" at 3787.5,1682.5 h62
MIN1_EndstopChannel1: Mechanical 16 "1" at 3692.5,2047.5 h62 r180
MIN1_EndstopChannel2: Mechanical 16 "1" at 4532.5,2047.5 h62 r180
MIN1_EndstopChannel3: Mechanical 16 "1" at 4112.5,2047.5 h62 r180
"Motor Power": Top Overlay "2" at 5185,500 h77.5 r270; Top Overlay "1" at 5185,685 h77.5 r270
P2_ThermistorChannel1: Mechanical 16 "1" at 4527.5,2557.5 h62 r90
P2_ThermistorChannel2: Mechanical 16 "1" at 4527.5,2942.5 h62 r90
T2_ThermocoupleChannel1: Mechanical 16 "1" at 3972.5,2557.5 h62 r90
T2_ThermocoupleChannel2: Mechanical 16 "1" at 3972.5,2942.5 h62 r90
U3: Top Overlay "R" at 1438.56,2107.73 h37.2 r270; Top Overlay "TQFP 144" at 1383.05,2352.36 h49.6 r270